# Altium PCB Array.PcbDoc
Units mm, origin at the board's own origin, x right, y up, seen from the top; angles counter-clockwise.
Board outline 49.01 x 100 mm, 2 copper layers (Top Layer, Bottom Layer); 19 components, 39 nets, 180 pads, 15 vias.
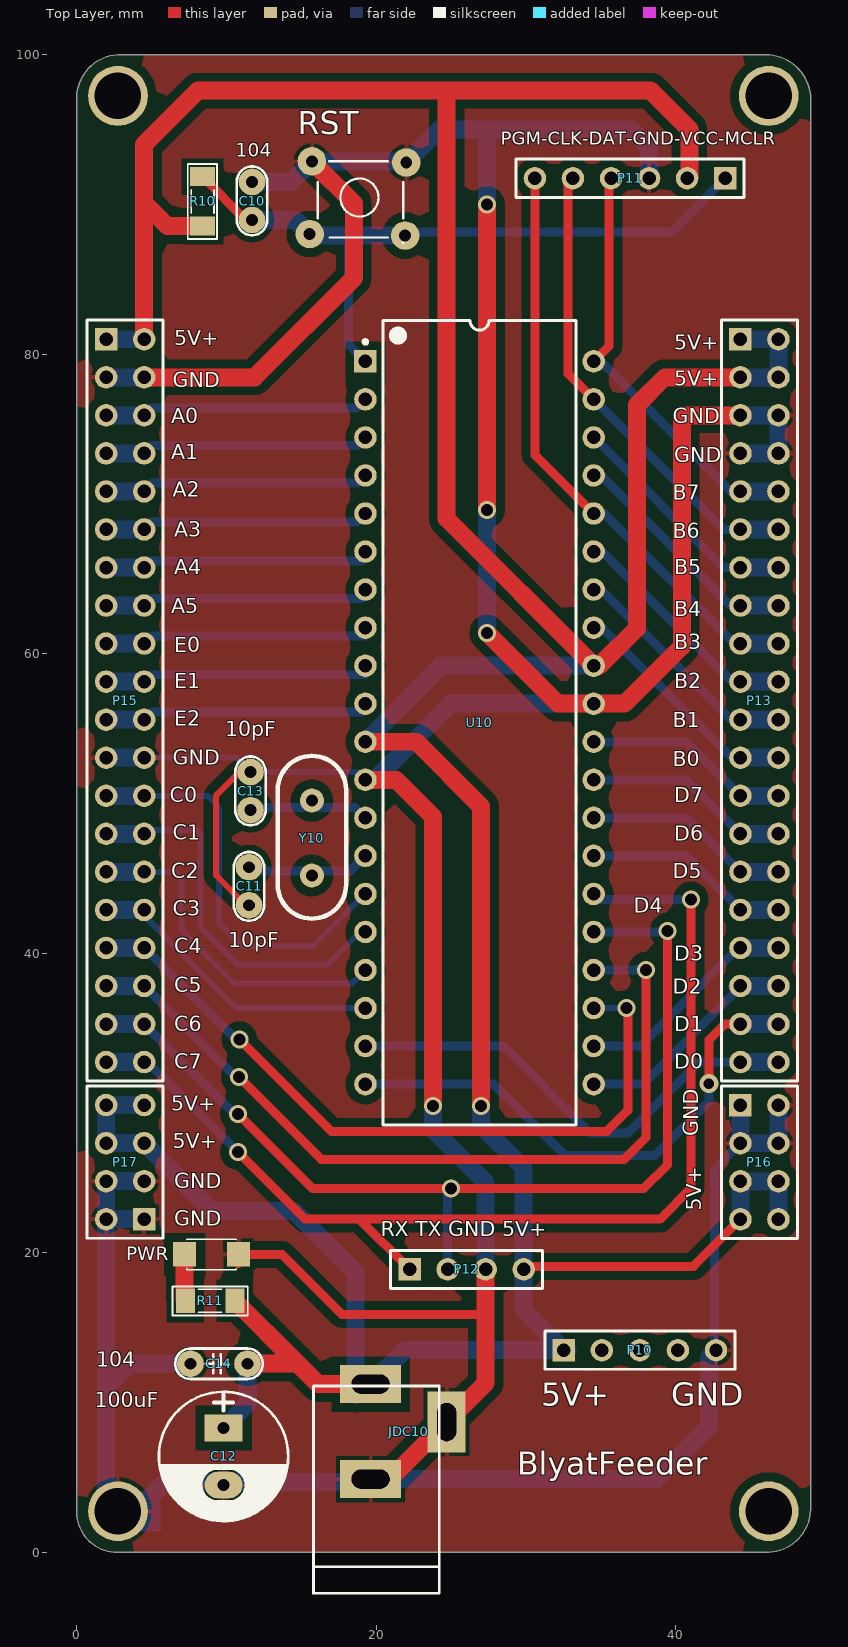
[diagram p0: Top Layer view]
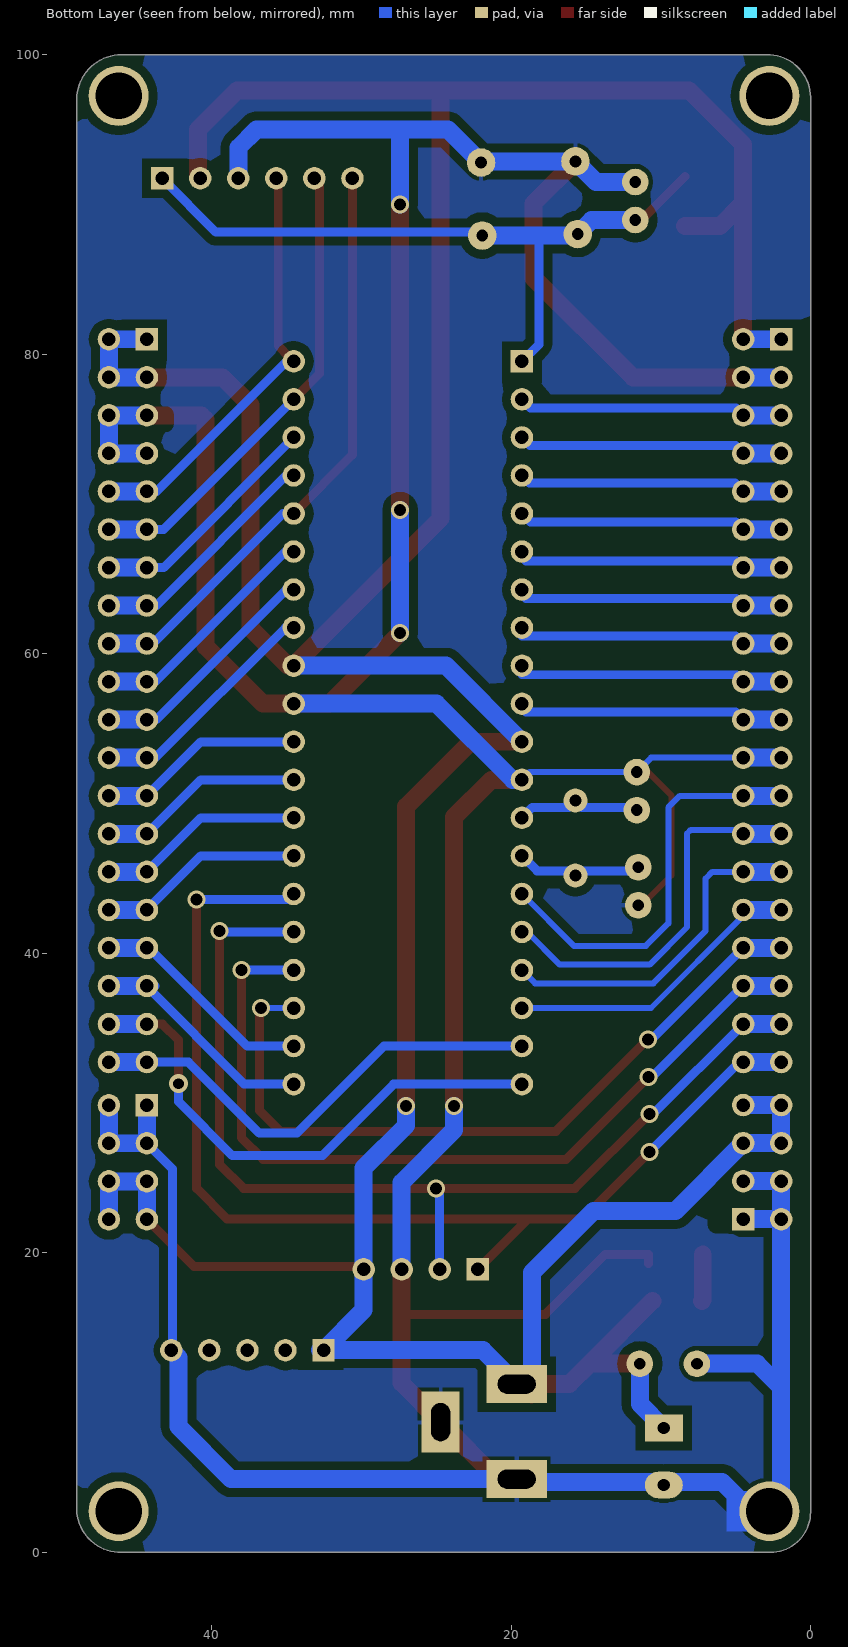
[diagram p1: Bottom Layer view, seen from below]
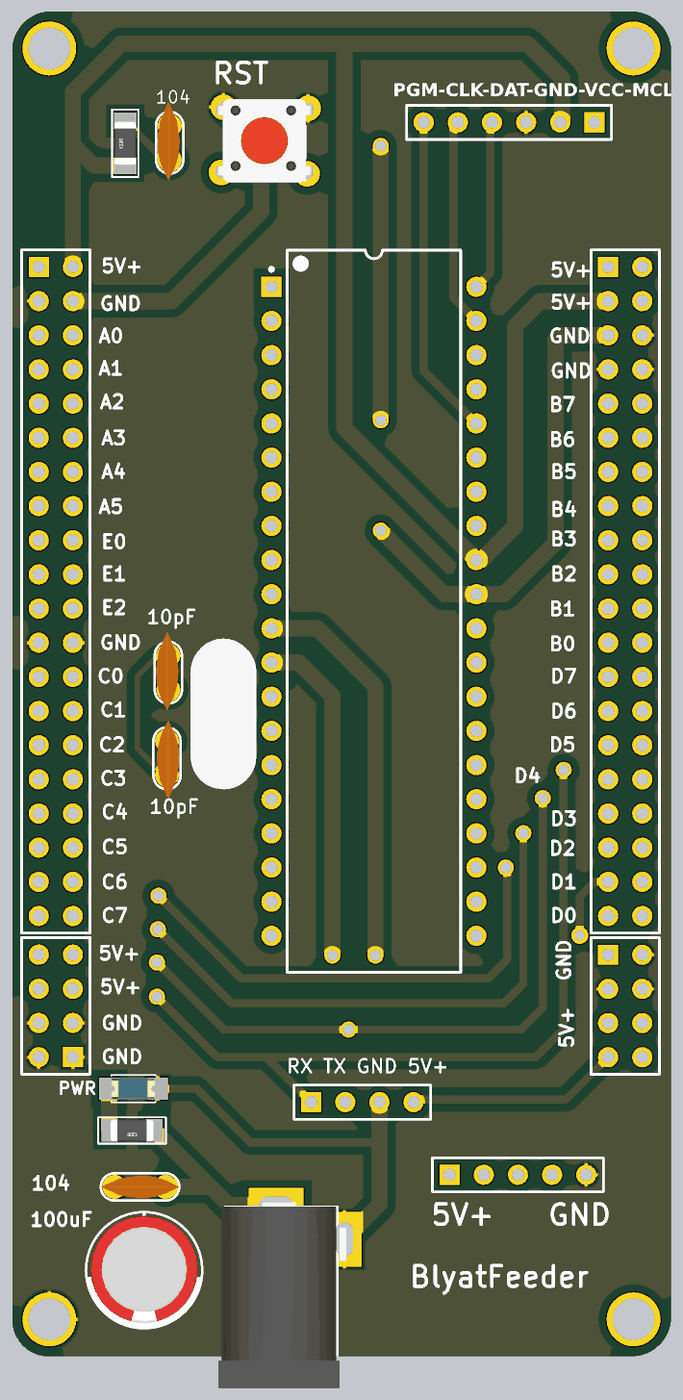
[diagram p2: 3D render of the assembled board from above, using the file's embedded part models]

## Layer stack, top to bottom
Top Solder: solder mask 0.0102, Solder Resist, Dk 3.5
Top Layer: signal copper 0.0356
Dielectric 1: dielectric 0.32, FR-4, Dk 4.8
Bottom Layer: signal copper 0.0356
Bottom Solder: solder mask 0.0102, Solder Resist, Dk 3.5

## Board outline
0,2.7 0,96.9 cw(c2.9,97.1) 2.7,100 46,100 cw(c46,97) 49,97 49,2.9 cw(c46.05,2.95) 46,0 2.7,0 cw(c2.7,2.7)

## Design rules (kind name [scope] priority, off if disabled: settings)
Clearance [InPolygon] p1: gap=0.6
Clearance Clearance_1 [All] p2: gap=0.254
PlaneClearance [All] p1: clearance=1
PolygonConnect [All] p1: connectstyle=Relief reliefconductorwidth=0.254 reliefentries=4 polygonreliefangle="90 Angle" airgapwidth=0.254
RoomDefinition PIC16F887 [InComponentClass('PIC16F887')] p1: confinementstyle=ConfineIn formatcopy=TRUE lockcomponents=FALSE outline 91.936,111.581 237.478,111.581 237.478,169.874 91.936,169.874
RoutingVias [All] p1: holewidth=0.8 width=1.2 viastyle="Through Hole" minholewidth=0.8 minwidth=1.2 maxholewidth=0.8 maxwidth=1.2
SolderMaskExpansion [All] p1: expansion=0.102
Width [All] p1: maxlimit=1.2 minlimit=0.4 preferedwidth=0.6
29 further rules are at their usual default settings.

## Classes and differential pairs
component class PIC16F887: C10 C11 C13 C14 JDC10 P10 P11 P12 P13 P15 P16 P17 PWR R10 R11 RST Y10

## Components (designator, comment, footprint, x,y, rotation, side; value= is the part's Value field where it differs from the comment)
C10 "100pF" CN1 11.7,88.96 r90 top
C11 "22pF" CN1 11.5,45.75 r270 top
C12 "100uF/35V" CP1.5/3.4 9.8,8.31 r270 top
C13 "22pF" CN1 11.6,49.56 r90 top
C14 "104" CN1.5 7.59,12.6 r0 top
JDC10 "Jac DC" DC-IN 22.16,8.065 r90 top
P10 "Header 5" HDR1X5 32.52,13.5 r0 top
P11 "Header 6" HDR1X6 43.29,91.75 r180 top
P12 "Header 4" HDR1X4 22.22,18.9 r0 top
P13 "Header 20X2" HDR2X20 44.31,81 r270 top
P15 "Header 20X2" HDR2X20 1.961,81 r270 top
P16 "Header 4X2" HDR2X4 44.31,29.859 r270 top
P17 "Header 4X2" HDR2X4 4.501,22.247 r90 top
PWR "LED" LED-1206-Blue 7.2,19.9 r0 top (schematic designator LED10)
R10 "10K" RES-SMD-1206 8.4,90.2 r90 top
R11 "1K" RES-SMD-1206 8.9,16.8 r180 top
RST "SW" SW4 15.701,92.876 r0 top (schematic designator SW10)
U10 "PIC16F887-I/P" PDIP600-P40 26.891,55.396 r0 top
Y10 "20MHz" XTAL 15.7,47.75 r90 top

## Footprints (in the part's own frame and the unit in brackets; to place one, negate y for a bottom-side part, rotate by r counter-clockwise, add the part's x,y. Pads: shape width x height; smd on the part's side, far side on the other; paste and mask are expansions set on the pad)
CN1 [mil]
  round 70 hole 31: 1(0,0) 2(100,0)
  silkscreen extent -40,-40 141,40, body extent -60,-30 170,37, height 265
CN1.5 [mil]
  round 70 hole 31: 1(0,0) 2(150,0)
  silkscreen extent -40,-40 190,40, body extent -40,-33 190,33, height 235
CP1.5/3.4 [mil] "Tu hoa 220->470uF,16V, 470uF/16V,25V"
  rect 70x100 hole 32: 1(0,0)
  oval 70x100 hole 32: 2(150,0)
  silkscreen extent -95,-170 245,170, body extent -85,-157 230,157, height 446
DC-IN [mil] "Jac DC input"
  rect 100x160 hole 50 slot 100 at 90 deg: 1(125,100) 2(-125,100)
  rect 160x100 hole 50 slot 100 at 0 deg: 3(25,-100)
  silkscreen extent -425,-80 120,250, body extent -410,-105 134,269, height 434
HDR1X4 [mm] "Connector; Header; 4 Position"
  rect 1.5x1.5 hole 0.9: 1(0,0)
  round 1.5 hole 0.9: 2(2.54,0) 3(5.08,0) 4(7.62,0)
  silkscreen extent -1.27,-1.27 8.89,1.27
HDR1X5 [mm] "Connector; Header; 5 Position"
  rect 1.5x1.5 hole 0.9: 1(0,0)
  round 1.5 hole 0.9: 2(2.54,0) 3(5.08,0) 4(7.62,0) 5(10.16,0)
  silkscreen extent -1.27,-1.27 11.43,1.27
HDR1X6 [mm] "Connector; Header; 6 Position"
  rect 1.5x1.5 hole 0.9: 1(0,0)
  round 1.5 hole 0.9: 2(2.54,0) 3(5.08,0) 4(7.62,0) 5(10.16,0) 6(12.7,0)
  silkscreen extent -1.27,-1.27 13.97,1.27
HDR2X4 [mm] "Connector; Header; 4x2 Position"
  rect 1.5x1.5 hole 0.9: 1(0,0)
  round 1.5 hole 0.9: 2(0,2.54) 3(2.54,0) 4(2.54,2.54) 5(5.08,0) 6(5.08,2.54) 7(7.62,0) 8(7.62,2.54)
  silkscreen extent -1.27,-1.27 8.89,3.81
HDR2X20 [mm] "Connector; Header; 20x2 Position"
  rect 1.5x1.5 hole 0.9: 1(0,0)
  round 1.5 hole 0.9: 2(0,2.54) 3(2.54,0) 4(2.54,2.54) 5(5.08,0) 6(5.08,2.54) 7(7.62,0) 8(7.62,2.54) 9(10.16,0) 10(10.16,2.54) 11(12.7,0) 12(12.7,2.54) 13(15.24,0) 14(15.24,2.54) 15(17.78,0) 16(17.78,2.54) 17(20.32,0) 18(20.32,2.54) 19(22.86,0) 20(22.86,2.54) 21(25.4,0) 22(25.4,2.54) 23(27.94,0) 24(27.94,2.54) 25(30.48,0) 26(30.48,2.54) 27(33.02,0) 28(33.02,2.54) 29(35.56,0) 30(35.56,2.54) 31(38.1,0) 32(38.1,2.54) 33(40.64,0) 34(40.64,2.54) 35(43.18,0) 36(43.18,2.54) 37(45.72,0) 38(45.72,2.54) 39(48.26,0) 40(48.26,2.54)
  silkscreen extent -1.27,-1.27 49.53,3.81
LED-1206-Blue [mil] "Compoment SMD 120x60mil"
  rect 60x65 smd: 1(0,0) 2(142,0)
  silkscreen extent 6,-40 136,40, body extent 7,-31 133,31, height 43
PDIP600-P40 [mm] "DIP, 40-Leads, Row Spacing 15.24mm, Pitch 2.54mm, Body 51.8x13.5mm"
  rect 1.5x1.5 hole 0.9: 1(-7.62,24.13)
  round 1.5 hole 0.9: 2(-7.62,21.59) 3(-7.62,19.05) 4(-7.62,16.51) 5(-7.62,13.97) 6(-7.62,11.43) 7(-7.62,8.89) 8(-7.62,6.35) 9(-7.62,3.81) 10(-7.62,1.27) 11(-7.62,-1.27) 12(-7.62,-3.81) 13(-7.62,-6.35) 14(-7.62,-8.89) 15(-7.62,-11.43) 16(-7.62,-13.97) 17(-7.62,-16.51) 18(-7.62,-19.05) 19(-7.62,-21.59) 20(-7.62,-24.13) 21(7.62,-24.13) 22(7.62,-21.59) 23(7.62,-19.05) 24(7.62,-16.51) 25(7.62,-13.97) 26(7.62,-11.43) 27(7.62,-8.89) 28(7.62,-6.35) 29(7.62,-3.81) 30(7.62,-1.27) 31(7.62,1.27) 32(7.62,3.81) 33(7.62,6.35) 34(7.62,8.89) 35(7.62,11.43) 36(7.62,13.97) 37(7.62,16.51) 38(7.62,19.05) 39(7.62,21.59) 40(7.62,24.13)
  silkscreen extent -7.74,-26.85 6.45,26.85, body extent -7.3,-26.85 7.3,26.85, height 6.35
RES-SMD-1206 [mil]
  rect 50x65 smd: 1(-65,0) 2(65,0)
  silkscreen extent -99,-38 99,39, body extent -63,-31 63,32, height 40
SW4 [mil] "SW button 4pin, 250 x250 mil"
  round 75 hole 31: 1(0,0) 2(245,-195) 3(248,-3) 4(-6,-191)
  silkscreen extent 15,-215 240,0, body extent -36,-220 276,24, height 276
XTAL [mm]
  round 1.6 hole 0.8: 1(-2.552,0.001) 2(2.448,0.001)
  silkscreen extent -5.44,-2.29 5.44,2.29, body extent -5.55,-2.32 5.62,2.35, height 3.63

## Part data
C10 C11 C13: library part CN1, "Cap np  1pF - 472pF"
C12: library part CP3, "Cap 100uF/35V - 470uF/16V"
C14: library part CN1.5, "Cap np 682pF => 104pF"
JDC10: library part DCIN, "Jac DC input"
P10: "Header, 5-Pin"
P11: "Header, 6-Pin"
P12: "Header, 4-Pin"
P13 P15: "Header, 20-Pin, Dual row"
P16 P17: "Header, 4-Pin, Dual row"
PWR: library part "LED SMD"
R10 R11: library part Res-SMD, "Resistor"
RST: library part SW4, "Switch button 4 pin"
U10: "Flash-Based, 8-Bit CMOS Microcontroller with nanoWatt Technology, 8K (x14-Bit words) Program Memory, 624 Bytes Data Memory, 35 I/O pins, 40-Pin PDIP, Standard VDD Range, Industrial Temperature"
Y10: library part XTAL, "Crystal Oscillator"

## Free pads (board coordinates)
  round 4 hole 3.1 paste+1: 0(46.2,97.25) 1(2.75,97.25) 2(46.2,2.75) 3(2.75,2.75)

## Via types
v1: diameter 1.2, hole 0.8, Top Layer to Bottom Layer, 14 vias
v2: diameter 1.27, hole 0.711, Top Layer to Bottom Layer, 1 vias

## Nets (pads, with @x,y where several pads share a name; then routed paths per layer and width w, separated by ;. In a path a pad name is that pad's centre, name@x,y a point inside that pad or via, vN(x,y) a via of type N, cw(c..) or ccw(c..) an arc to the next point about the centre after c; other vN are vias at no path point)
GND: C10.2 C11.2 C12.2 C13.2 C14.1 JDC10.2 JDC10.3 P10.5 P11.3 P12.3 P13.5 P13.6 P13.7 P13.8 P15.3 P15.4 P15.23 P15.24 P16.1 P16.2 P16.3 P16.4 P17.1 P17.2 P17.3 P17.4 pad.3 PWR.2 RST.1 RST.3 U10.12 U10.31 | length 359.4
  Top Layer w0.4: C11.2 11.29,43.21 9.3,45.2 9.3,50.55 10.85,52.1 C13.2
  Top Layer w0.6: PWR.2@10.807,19.293 PWR.2 13.7,19.9 17.7,15.9 27.3,15.9
  Top Layer w1.2: P15.4 11.86,78.46 18.5,85.1 18.5,90.077 RST.1 ; U10.12 21.314,51.586 23.8,49.1 v1(23.8,29.8) ; JDC10.2 20.89,4.89 JDC10.3 27.3,11.3 27.3,15.9 P12.3 ; v1(27.4,61.4) 32.134,56.666 U10.31 36.566,56.666 40.4,60.5 40.4,75.64 40.68,75.92 P13.5 ; v1(27.4,69.6) v1(27.4,90)
  Bottom Layer w0.4: P15.24 10.64,53.06 C13.2 18.757,52.1 U10.12
  Bottom Layer w0.6: P10.5 42.591,13.589 42.591,25.6 P16.3
  Bottom Layer w1.2: P15.23 P15.24 ; P15.3 P15.4 ; P17.1 P17.2 ; P17.3 P17.4 P17.2 ; C14.1 3.561,12.6 1.961,11 ; C10.2 14.325,91.5 RST.1 21.924,92.876 RST.3 24.2,95 27.4,95 ; U10.12 19.886,51.586 24.966,56.666 U10.31 ; v1(23.8,29.8) 23.8,28.2 27.3,24.7 P12.3 ; v1(27.4,61.4) v1(27.4,69.6) ; v1(27.4,90) 27.4,95 ; P11.3 38.21,93.79 37,95 27.4,95 ; P10.5 42.2,13.02 42.2,8.4 38.69,4.89 JDC10.2 19.43,4.7 10,4.7 C12.2 9.6,4.7 5.9,4.7 3.95,2.75 pad.3 1.961,3.539 1.961,11 ; P16.1 P16.3 P16.4 P16.2 ; P13.7 P13.8 P13.6 P13.5 ; 1.961,11 P17.2
MCLR: C10.1 P11.1 R10.2 RST.2 RST.4 U10.1 | length 47.2
  Top Layer w0.6: R10.2 11.291,88.96 C10.1
  Bottom Layer w0.6: 18.148,88.125 18.148,87.923 18.148,80.649 U10.1 ; RST.2 22.161,88.16 39.7,88.16 P11.1
  Bottom Layer w1.2: C10.1 14.613,88.96 RST.4 15.65,87.923 18.148,87.923 RST.2
NetLED10_1: PWR.1 R11.2 | length 3.1
  Top Layer w1.2: PWR.1 7.2,16.849 R11.2
RA0: P15.5 P15.6 U10.2 | length 17.8
  Bottom Layer w0.6: P15.6 4.981,76.4 18.685,76.4 U10.2
  Bottom Layer w1.2: P15.5 P15.6
RA1: P15.7 P15.8 U10.3 | length 17.8
  Bottom Layer w0.6: P15.8 5.021,73.9 18.725,73.9 U10.3
  Bottom Layer w1.2: P15.7 P15.8
RA2: P15.9 P15.10 U10.4 | length 17.8
  Bottom Layer w0.6: P15.10 5.061,71.4 18.765,71.4 U10.4
  Bottom Layer w1.2: P15.9 P15.10
RA3: P15.11 P15.12 U10.5 | length 17.8
  Bottom Layer w0.6: P15.12 5.001,68.8 18.705,68.8 U10.5
  Bottom Layer w1.2: P15.11 P15.12
RA4: P15.13 P15.14 U10.6 | length 18
  Bottom Layer w0.6: P15.14 4.941,66.2 19,66.2 19.271,66.471 U10.6
  Bottom Layer w1.2: P15.13 P15.14
RA5: P15.15 P15.16 U10.7 | length 17.9
  Bottom Layer w0.6: P15.16 4.981,63.7 19,63.7 19.271,63.971 U10.7
  Bottom Layer w1.2: P15.15 P15.16
RA6: C11.1 U10.14 Y10.1 | length 9.1
  Top Layer w0.4: Y10.1 Y10.1@15.699,45.599
  Bottom Layer w0.6: C11.1@11.5,46.04 12.04,45.5 15.397,45.5 Y10.1 16.001,45.5 18.265,45.5 U10.14
RA7: C13.1 U10.13 Y10.2 | length 8.4
  Bottom Layer w0.6: C13.1 11.79,49.75 15.251,49.75 Y10.2 16.147,49.75 18.567,49.75 U10.13
RB0: P13.23 P13.24 U10.33 | length 15.9
  Bottom Layer w0.6: U10.33 35.054,61.746 43.74,53.06 P13.23
  Bottom Layer w1.2: P13.23 P13.24
RB1: P13.21 P13.22 U10.34 | length 15.9
  Bottom Layer w0.6: U10.34 35.014,64.286 43.7,55.6 P13.21
  Bottom Layer w1.2: P13.21 P13.22
RB2: P13.19 P13.20 U10.35 | length 15.9
  Bottom Layer w0.6: U10.35 35.074,66.826 43.76,58.14 P13.19
  Bottom Layer w1.2: P13.19 P13.20
RB3: P11.6 P13.17 P13.18 U10.36 | length 39.9
  Top Layer w0.6: P11.6 30.59,73.287 U10.36
  Bottom Layer w0.6: U10.36 35.234,69.366 43.92,60.68 P13.17
  Bottom Layer w1.2: P13.17 P13.18
RB4: P13.15 P13.16 U10.37 | length 15.9
  Bottom Layer w0.6: U10.37 34.994,71.906 43.68,63.22 P13.15
  Bottom Layer w1.2: P13.15 P13.16
RB5: P13.13 P13.14 U10.38 | length 15.9
  Bottom Layer w0.6: U10.38 43.197,65.76 P13.13
  Bottom Layer w1.2: P13.13 P13.14
RB6: P11.5 P13.11 P13.12 U10.39 | length 31.5
  Top Layer w0.6: P11.5 32.8,91.42 32.8,78.697 U10.39
  Bottom Layer w0.6: U10.39 43.197,68.3 P13.11
  Bottom Layer w1.2: P13.11 P13.12
RB7: P11.4 P13.9 P13.10 U10.40 | length 28.6
  Top Layer w0.6: U10.40 34.8,79.815 35.543,80.557 35.543,91.623 P11.4
  Bottom Layer w0.6: U10.40 34.974,79.526 43.66,70.84 P13.9
  Bottom Layer w1.2: P13.9 P13.10
RC0: P15.25 P15.26 U10.15 | length 27.4
  Bottom Layer w0.4: P15.26 8.73,50.52 9.5,49.75 9.5,42 11,40.5 15.805,40.5 U10.15
  Bottom Layer w1.2: P15.25 P15.26
RC1: P15.27 P15.28 U10.16 | length 25.7
  Bottom Layer w0.4: P15.28 4.771,48.25 8,48.25 8.25,48 8.25,41.75 10.75,39.25 16.75,39.25 18.926,41.426 U10.16
  Bottom Layer w1.2: P15.27 P15.28
RC2: P15.29 P15.30 U10.17 | length 22.8
  Bottom Layer w0.4: P15.30 6.56,45.44 7,45 7,41.5 10.5,38 18.385,38 U10.17
  Bottom Layer w1.2: P15.29 P15.30
RC3: P15.31 P15.32 U10.18 | length 20.3
  Bottom Layer w0.4: P15.32 4.501,42.499 10.654,36.346 U10.18
  Bottom Layer w1.2: P15.31 P15.32
RC4: P15.33 P15.34 U10.23 | length 49.6
  Top Layer w0.6: v1(10.861,34.25) 17,28.111 35.4,28.111 36.8,29.511 v1@36.8,36.4
  Bottom Layer w0.4: U10.23 v1(36.7,36.346)
  Bottom Layer w0.6: P15.34 10.611,34.25 v1(10.861,34.25)
  Bottom Layer w1.2: P15.33 P15.34
RC5: P15.35 P15.36 U10.24 | length 56.2
  Top Layer w0.6: v1(10.821,31.75) 16.321,26.25 36.55,26.25 38,27.7 v1(38,38.9)
  Bottom Layer w0.6: P15.36 10.571,31.75 v1(10.821,31.75) ; U10.24 34.625,39 34.725,38.9 v1(38,38.9)
  Bottom Layer w1.2: P15.35 P15.36
RC6: P12.2 P15.37 P15.38 U10.25 | length 68.8
  Top Layer w0.6: v1(10.75,29.281) 15.731,24.3 v1(25,24.3) 37.85,24.3 39.45,25.9 v1(39.45,41.5)
  Bottom Layer w0.6: P15.38 10.5,29.281 v1(10.75,29.281) ; P12.2 24.76,24.06 v1(25,24.3) ; U10.25 39.376,41.426 v1(39.45,41.5)
  Bottom Layer w1.2: P15.37 P15.38
RC7: P12.1 P15.39 P15.40 U10.26 | length 74.9
  Top Layer w0.6: v1(10.75,26.741) 15.241,22.25 18.87,22.25 ; P12.1 18.87,22.25 ; v1(41,43.6) 41,24.3 38.95,22.25 18.87,22.25
  Bottom Layer w0.6: P15.40 4.751,32.74 v1(10.75,26.741) ; U10.26 34.545,44 34.945,43.6 v1(41,43.6)
  Bottom Layer w1.2: P15.39 P15.40
RD0: P13.39 P13.40 U10.19 | length 31.9
  Bottom Layer w0.6: U10.19 28.494,33.806 34.3,28 36.8,28 41.54,32.74 P13.39
  Bottom Layer w1.2: P13.39 P13.40
RD1: P13.37 P13.38 U10.20 | length 35.6
  Top Layer w0.6: v2(42.2,31.3) 42.2,34.2 43.28,35.28 P13.37
  Bottom Layer w0.6: U10.20 27.834,31.266 32.6,26.5 38.6,26.5 42.2,30.1 v2(42.2,31.3)
  Bottom Layer w1.2: P13.37 P13.38
RD2: P13.35 P13.36 U10.21 | length 15.7
  Bottom Layer w0.6: U10.21 37.816,31.266 P13.35@44.37,37.82 ; P13.35@43.77,37.82 P13.35
  Bottom Layer w1.2: P13.35 44.37,37.82 P13.36
RD3: P13.33 P13.34 U10.22 | length 15.1
  Bottom Layer w0.6: U10.22 37.606,33.806 44.072,40.272 44.222,40.272 P13.33
  Bottom Layer w1.2: P13.33 P13.34
RD4: P13.31 P13.32 U10.27 | length 13.8
  Bottom Layer w0.6: U10.27 40.704,46.506 P13.31
  Bottom Layer w1.2: P13.31 P13.32
RD5: P13.29 P13.30 U10.28 | length 13.8
  Bottom Layer w0.6: U10.28 40.704,49.046 P13.29
  Bottom Layer w1.2: P13.29 P13.30
RD6: P13.27 P13.28 U10.29 | length 13.8
  Bottom Layer w0.6: U10.29 40.704,51.586 P13.27
  Bottom Layer w1.2: P13.27 P13.28
RD7: P13.25 P13.26 U10.30 | length 13.8
  Bottom Layer w0.6: U10.30 40.704,54.126 P13.25
  Bottom Layer w1.2: P13.25 P13.26
RE0: P15.17 P15.18 U10.8 | length 18.1
  Bottom Layer w0.6: P15.18 5.021,61.2 19.271,61.2 U10.8
  Bottom Layer w1.2: P15.17 P15.18
RE1: P15.19 P15.20 U10.9 | length 18.1
  Bottom Layer w0.6: P15.20 4.961,58.6 19.271,58.6 U10.9
  Bottom Layer w1.2: P15.19 P15.20
RE2: P15.21 P15.22 U10.10 | length 17.9
  Bottom Layer w0.6: P15.22 5.001,56.1 19,56.1 19.271,56.371 U10.10
  Bottom Layer w1.2: P15.21 P15.22
VCC: C12.1 C14.2 JDC10.1 P10.1 P11.2 P12.4 P13.1 P13.2 P13.3 P13.4 P15.1 P15.2 P16.5 P16.6 P16.7 P16.8 P17.5 P17.6 P17.7 P17.8 R10.1 R11.1 U10.11 U10.32 | length 297.7
  Top Layer w0.6: JDC10.1@18.63,10.25 JDC10.1 ; P12.4 30.04,19.1 41.171,19.1 P16.7 ; P13.3@44.31,78.1 P13.3
  Top Layer w1.2: P15.2 4.5,81.001 4.5,94 8.1,97.6 24.7,97.6 ; 4.501,91.501 4.501,90.099 6.051,88.549 R10.1 ; R11.1 14.7,12.651 ; C14.2 14.649,12.6 14.7,12.651 ; U10.11 22.674,54.126 27,49.8 v1(27,29.8) ; JDC10.1 16.111,11.24 14.7,12.651 ; P11.2@40.9,91.9 40.9,95 38.3,97.6 24.7,97.6 ; P13.3 39.26,78.46 37.4,76.6 37.4,61.7 34.906,59.206 U10.32 24.7,69.017 24.7,97.6
  Bottom Layer w1.2: P15.1 P15.2 ; P17.7 P17.8 P17.6 P17.5 9.028,22.8 14.5,22.8 18.6,18.7 18.6,12.26 JDC10.1 21.88,13.5 P10.1 ; C12.1 11.4,9.91 C14.2 ; U10.11 24.351,59.206 U10.32 ; v1(27,29.8) 27,28.5 29.84,25.66 P12.4 29.84,16.18 P10.1 ; P10.1@32.75,13.5 P10.1 ; P16.7 P16.5 P16.6 P16.8 ; P13.3 P13.4 P13.2 P13.1
pads on no net: P10.2 P10.3 P10.4

## Polygon pours and split planes (outlines as drawn)
GND on Top Layer "top" (solid, remove dead copper, pour order 34): 0,100 48.9,100 49,100.1 49,0 0,0
GND on Bottom Layer "top" (solid, remove dead copper, pour order 36): 0,100 49,100 49,0 0,0

## Other copper
Bottom Layer:
  rectangle net GND: 2.9,1.4 5.6,4.1

## Silkscreen, mask and mechanical layers (free items; w line width, h text height)
Top Overlay:
  text "PGM-CLK-DAT-GND-VCC-MCLR" at 28.3,93.7 h1.5
  text "104" at 10.6,93.2 h0.9
  text "5V+" at 6.5,80.6 h1
  text "5V+" at 39.9,80.3 h1
  text "5V+" at 39.9,77.9 h1
  text "GND" at 6.4,77.8 h1
  text "A0" at 6.3,75.4 h1
  text "GND" at 39.8,75.4 h1
  text "A1" at 6.3,73 h1
  text "GND" at 39.9,72.8 h1
  text "A2" at 6.4,70.5 h1
  text "B7" at 39.8,70.3 h1
  text "A3" at 6.5,67.8 h1
  text "B6" at 39.8,67.7 h1
  text "A4" at 6.5,65.3 h1
  text "B5" at 39.9,65.3 h1
  text "A5" at 6.3,62.7 h1
  text "B4" at 39.9,62.5 h1
  text "B3" at 39.9,60.3 h1
  text "E0" at 6.5,60.1 h1
  text "E1" at 6.5,57.7 h1
  text "B2" at 39.9,57.7 h1
  text "E2" at 6.5,55.2 h1
  text "B1" at 39.8,55.1 h1
  text "10pF" at 9.9,54.5 h1
  text "GND" at 6.4,52.6 h1
  text "B0" at 39.8,52.5 h1
  text "C0" at 6.2,50.1 h1
  text "D7" at 39.9,50.1 h1
  text "C1" at 6.4,47.6 h1
  text "D6" at 39.9,47.5 h1
  text "C2" at 6.3,45 h1
  text "D5" at 39.8,45 h1
  text "D4" at 37.2,42.7 h1
  text "C3" at 6.4,42.5 h1
  text "10pF" at 10.1,40.4 h1
  text "C4" at 6.5,40 h1
  text "D3" at 39.9,39.5 h1
  text "C5" at 6.5,37.4 h1
  text "D2" at 39.8,37.3 h1
  text "C6" at 6.5,34.8 h1
  text "D1" at 39.9,34.8 h1
  text "C7" at 6.5,32.3 h1
  text "D0" at 39.9,32.3 h1
  text "5V+" at 6.3,29.5 h1
  text "GND" at 41.5,27.8 h1 r90
  text "5V+" at 6.4,27 h1
  text "GND" at 6.5,24.3 h1
  text "5V+" at 41.7,22.8 h1 r90
  text "GND" at 6.5,21.8 h1
  text "RX TX GND 5V+" at 20.3,21.1 h1
  text "104" at 1.3,12.4 h1
  text "5V+" at 31,9.8 h1.52
  text "GND" at 39.7,9.8 h1.52
  text "100uF" at 1.2,9.7 h1
  text "BlyatFeeder" at 29.4,5.2 h1.52
Mechanical 1:
  the board outline again, w0.254